# Altium PCB Screen.PcbDoc
Units mil, origin at the board's own origin, x right, y up, seen from the top; angles counter-clockwise.
Board outline 1732.28 x 1732.28 mil, 2 copper layers (Top Layer, Bottom Layer); 17 components, 9 nets, 39 pads, 68 vias.
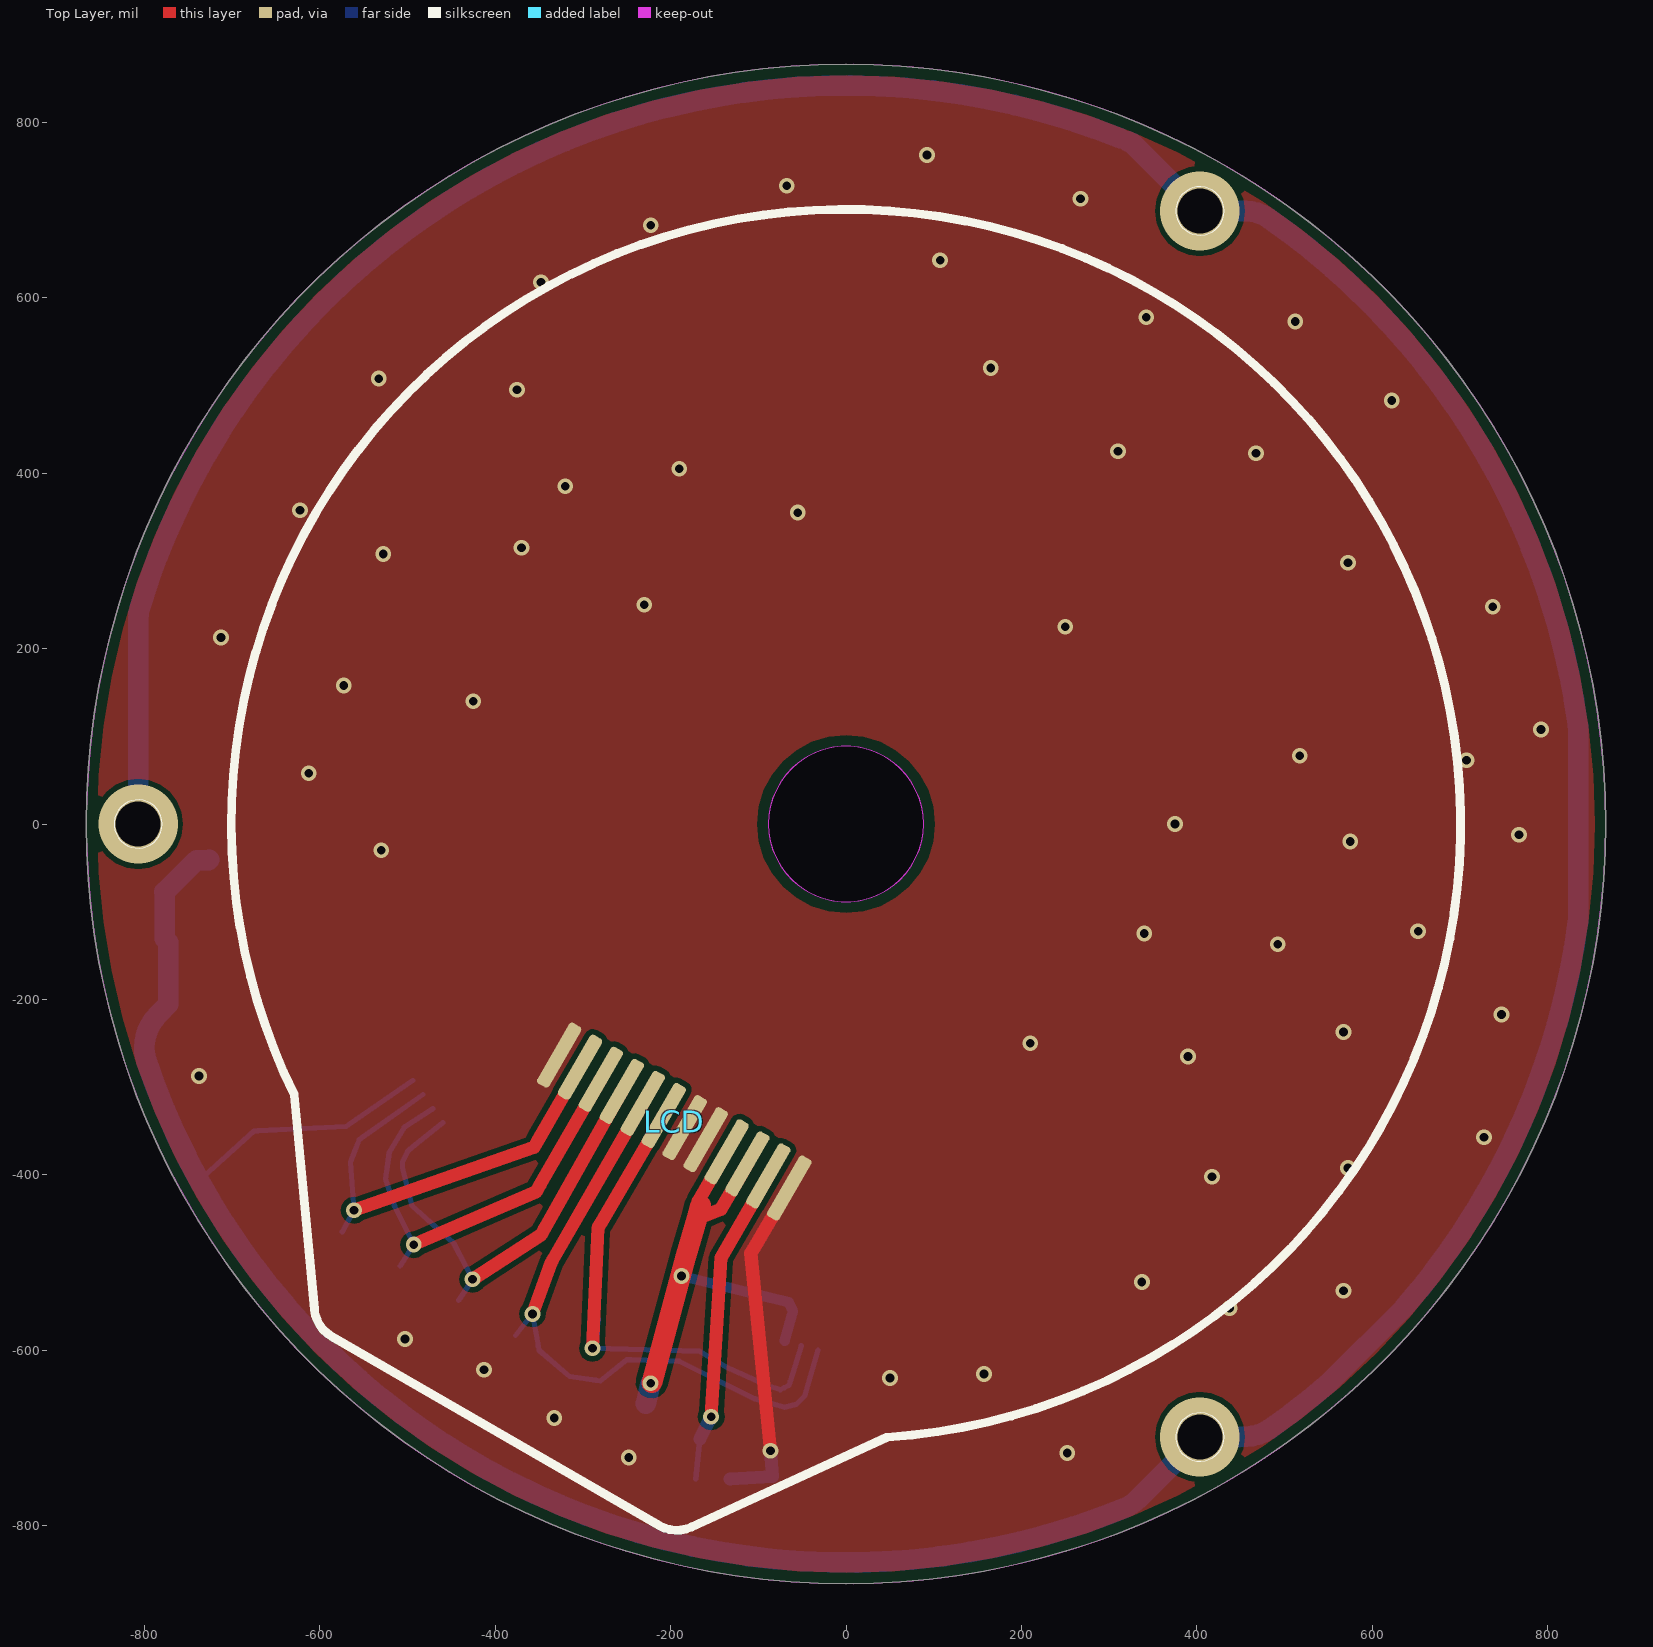
[diagram p0: Top Layer view]
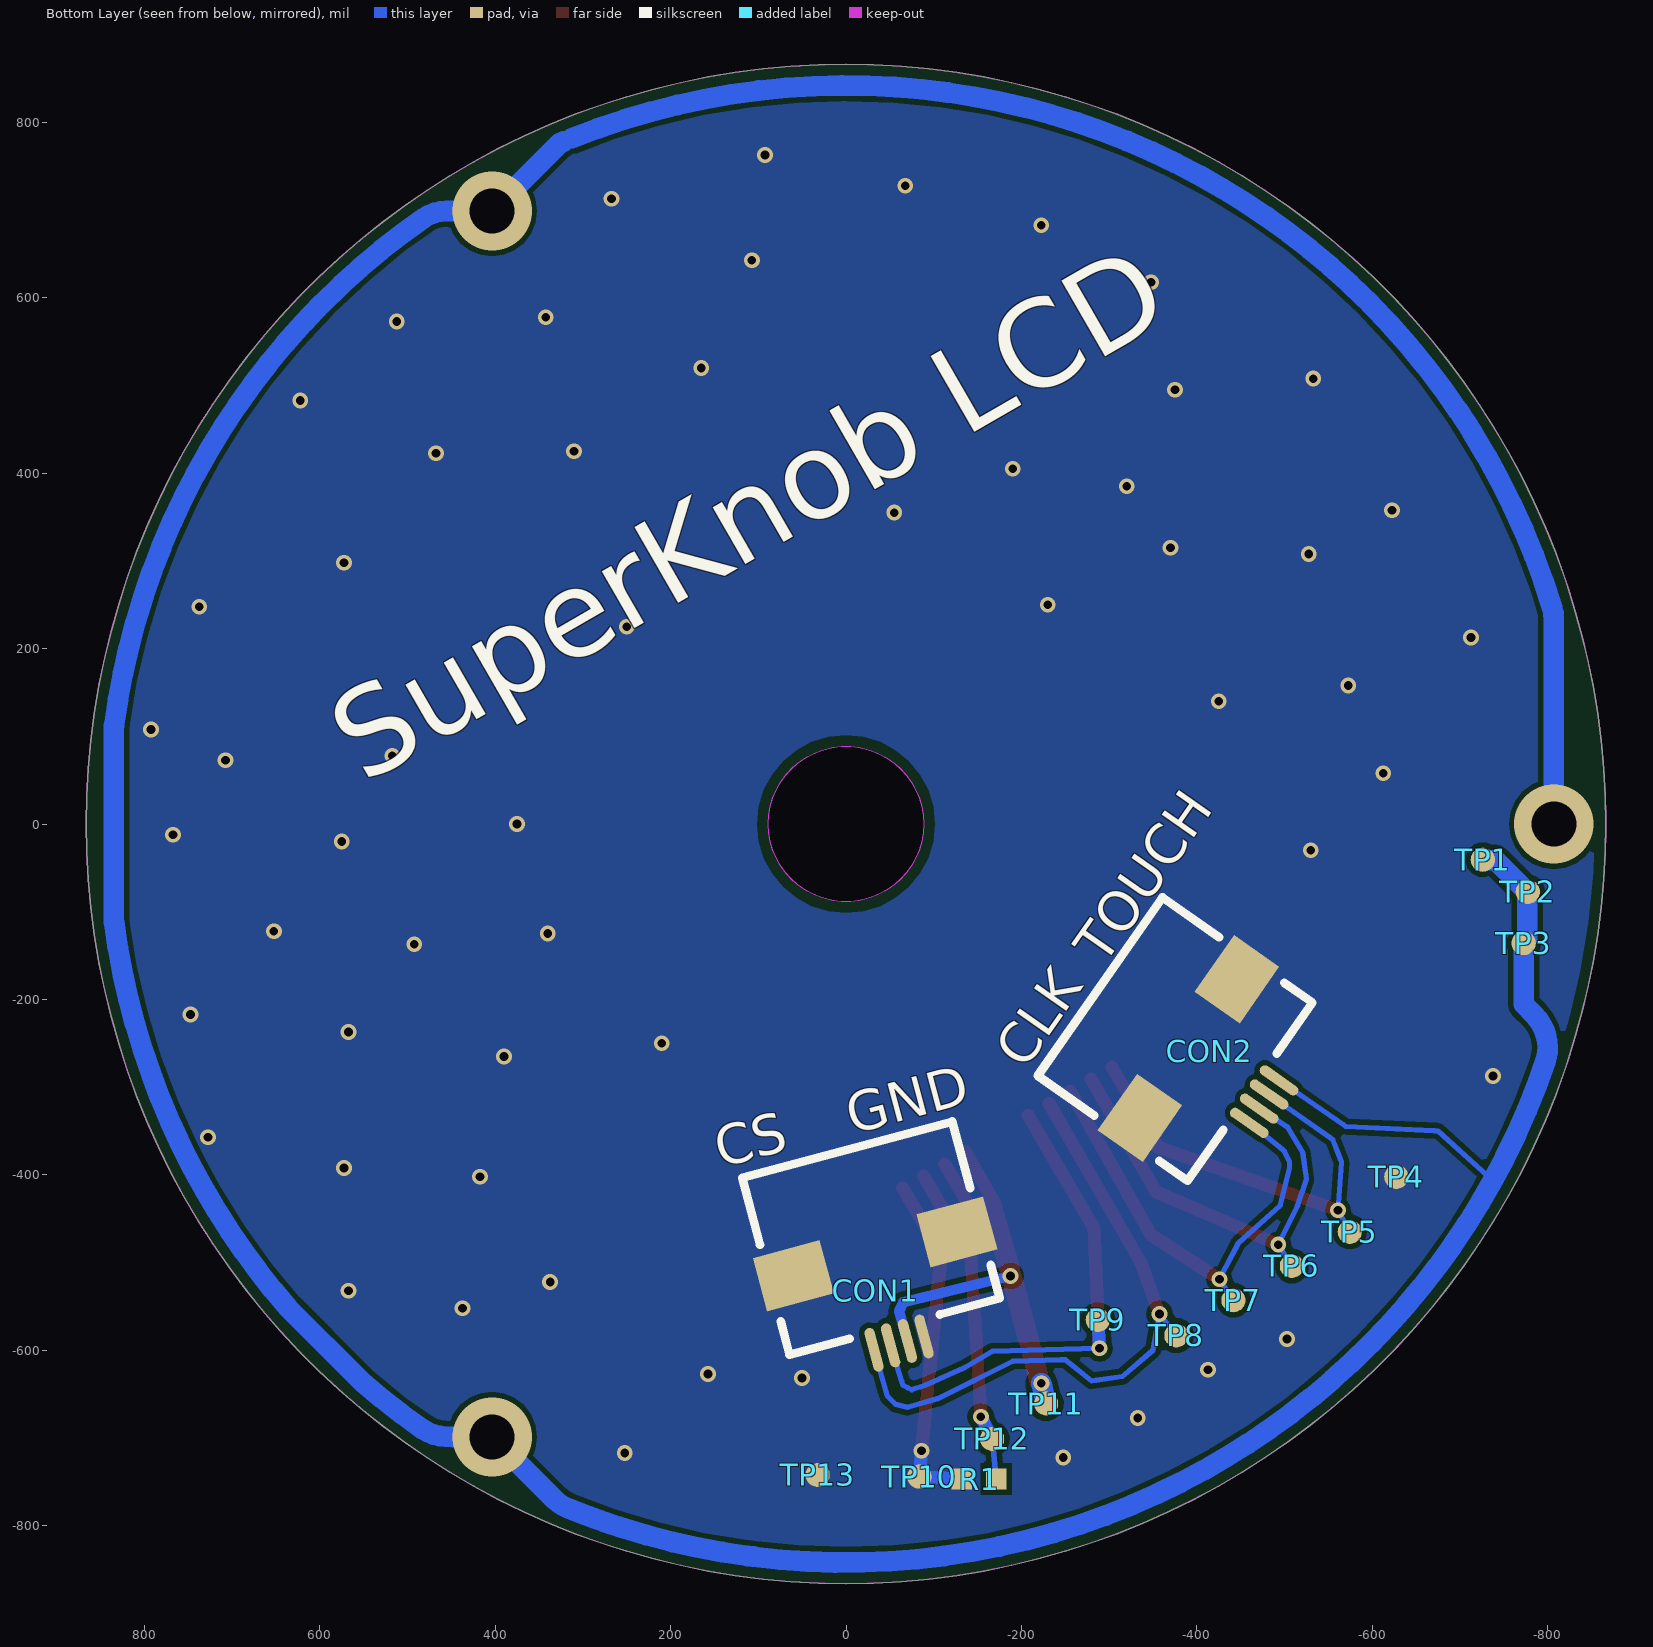
[diagram p1: Bottom Layer view, seen from below]
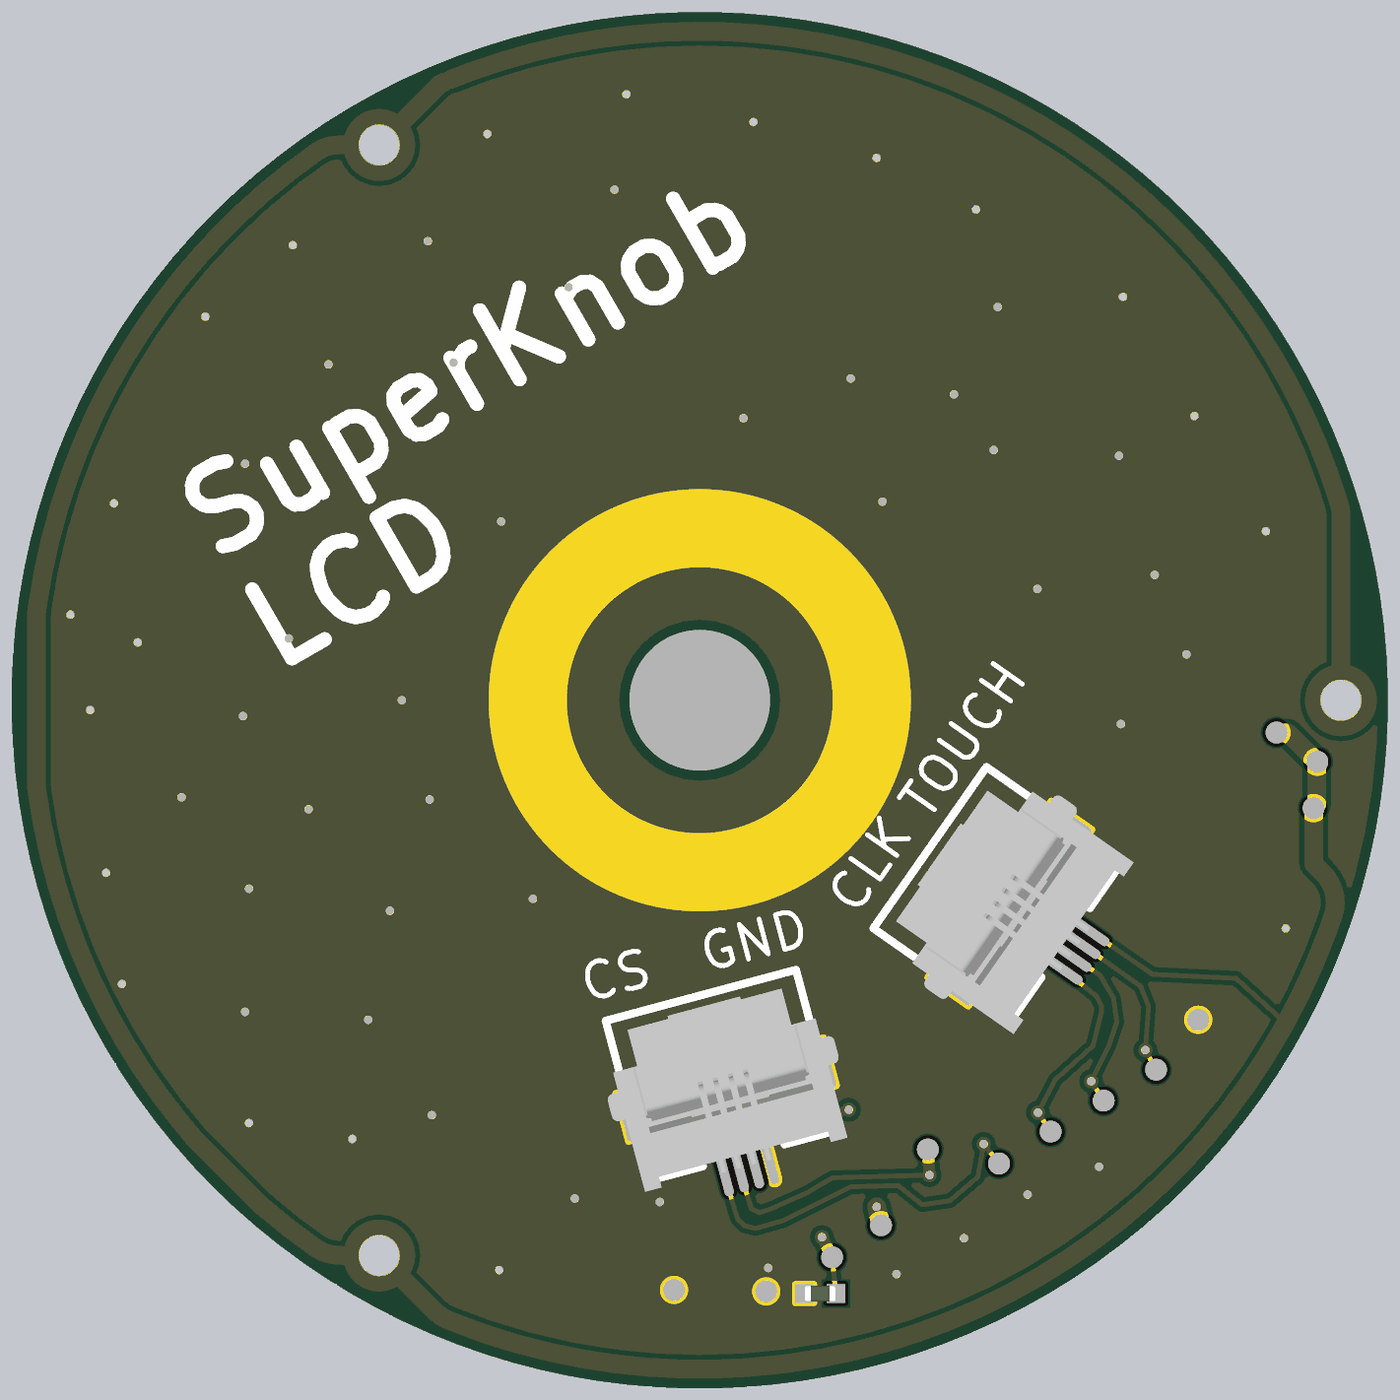
[diagram p2: 3D render of the assembled board from below, using the file's embedded part models]

## Layer stack, top to bottom
Top Solder: solder mask 0.4, Solder Resist, Dk 3.5
Top Layer: signal copper 1.4
Dielectric 1: dielectric 12.6, FR-4, Dk 4.8
Bottom Layer: signal copper 1.4
Bottom Solder: solder mask 0.4, Solder Resist, Dk 3.5

## Board outline
-866.14,0 ccw(c0,0) 0,-866.14 ccw(c0,0) 866.14,0 ccw(c0,0) 0,866.14 ccw(c0,0)
cut-out: -88.58,0 ccw(c0,0) 0,-88.58 ccw(c0,0) 88.58,0 ccw(c0,0) 0,88.58 ccw(c0,0)

## Design rules (kind name [scope] priority, off if disabled: settings)
Clearance Clearance_outline [OnLayer('Keep-Out Layer')] p1: gap=12 ignorepadtopadclearanceinfootprint=FALSE
Clearance [All] p2: gap=6 ignorepadtopadclearanceinfootprint=FALSE except(7: SMDPad-SMDPad; 8: Arc-Via Arc-Hole Track-Via Track-Hole SMDPad-Via SMDPad-Hole THPad-Via THPad-Hole Via-Via Via-Hole Fill-Hole Poly-Hole Region-Hole Text-Hole)
DiffPairsRouting [All] p1: maxlimit=10 minlimit=8 mostfreqgap=8 toplayer_minwidth=8 toplayer_maxwidth=8 toplayer_prefwidth=8 bottomlayer_minwidth=8 bottomlayer_maxwidth=8 bottomlayer_prefwidth=8 maxuncoupledlength=500
HoleToHoleClearance [All] p1: gap=0 allowstackedmicrovias=TRUE
MinimumSolderMaskSliver [All] p1: minsoldermaskwidth=0
PlaneConnect [All] p1: planeconnectstyle=Relief reliefexpansion=20 reliefentries=4 reliefconductorwidth=10 reliefairgap=20
PolygonConnect [All] p1: connectstyle=Direct reliefconductorwidth=10 reliefentries=4 polygonreliefangle="90 Angle" airgapwidth=20
RoutingVias [All] p1: holewidth=10 width=18 viastyle="Through Hole" minholewidth=10 minwidth=18 maxholewidth=78.74 maxwidth=300
SilkToSilkClearance [All] p1: silktosilkclearance=0
SilkToSolderMaskClearance [IsPad] p1: minsilkscreentomaskgap=0 clearancetoexposedcopper=TRUE
SolderMaskExpansion [All] p1: expansion=4 istentingtop=FALSE
Width [All] p1: maxlimit=100 minlimit=6 preferedwidth=6
24 further rules are at their usual default settings.

## Components (designator, comment, footprint, x,y, rotation, side; value= is the part's Value field where it differs from the comment)
CON1 "FPC_0.5mm_4P" FPC_0.5_4P -46.82,-540.99 r345 bottom locked
CON2 "FPC_0.5mm_4P" FPC_0.5_4P -433.54,-286.25 r305 bottom locked
LCD "LCD1" LCD-240x240-ROUND 0,0 r330 top locked
R1 "100R" RESC_0402 -151.64,-746.85 r180 bottom value=22R
TP1 "TP" TP -726.04,-40.68 r150 bottom
TP2 "TP" TP -777.38,-77.35 r150 bottom
TP3 "TP" TP -772.68,-135.8 r150 bottom
TP4 "TP" TP -627.46,-402.21 r150 bottom
TP5 "TP" TP -574.37,-465.04 r150 bottom
TP6 "TP" TP -508.38,-503.95 r150 bottom
TP7 "TP" TP -441.72,-542.98 r150 bottom
TP8 "TP" TP -376.69,-583.19 r150 bottom
TP9 "TP" TP -287.12,-565.44 r150 bottom
TP10 "TP" TP -83.65,-744.08 r150 bottom
TP11 "TP" TP -228.16,-660.79 r150 bottom
TP12 "TP" TP -166.64,-701.19 r150 bottom
TP13 "TP" TP 32.33,-742.22 r90 bottom

## Footprints (in the part's own frame and the unit in brackets; to place one, negate y for a bottom-side part, rotate by r counter-clockwise, add the part's x,y. Pads: shape width x height; smd on the part's side, far side on the other; paste and mask are expansions set on the pad)
FPC_0.5_4P [mm]
  rect 2x1.6 smd: 0(-2.45,-1.34) 0(2.45,-1.34)
  oval 0.3x1.3 smd: 1(-0.75,1.34) 2(-0.25,1.34) 3(0.25,1.34) 4(0.75,1.34)
  silkscreen extent -3.15,-4.46 3.15,0.84, body extent -3.75,-4.1 3.75,1.2, height 1.88
LCD-240x240-ROUND [mil]
  rrect50% 15.75x80 smd: 1(151.57,-391.76) 2(124.01,-391.76) 3(96.45,-391.76) 4(68.89,-391.76) 5(41.33,-391.76) 6(13.77,-391.76) 7(-13.79,-391.76) 8(-41.35,-391.76) 9(-68.91,-391.76) 10(-96.47,-391.76) 11(-124.03,-391.76) 12(-151.58,-391.76)
  silkscreen extent -701,-799 701,701, body extent -701,-799 701,701
RESC_0402 [mm]
  rect 0.6x0.6 smd: 1(-0.5,0) 2(0.5,0)
  body extent -0.5,-0.25 0.5,0.25, height 0.38
TP [mm]
  round 0.7 smd: 1(0,0)

## Part data
CON1 CON2: "FPC连接器"
LCD: library part LCD, "屏幕排线接口"
R1: library part 电阻-0402, "贴片电阻"
TP1 TP2 TP3 TP4 TP5 TP6 TP7 TP8 TP9 TP10 TP11 TP12 TP13: "测试点"

## Via types
v1: diameter 18, hole 10, Top Layer to Bottom Layer, tented both sides, 65 vias
v2: diameter 90.55, hole 51.18, Top Layer to Bottom Layer, 3 vias

## Nets (pads, with @x,y where several pads share a name; then routed paths per layer and width w, separated by ;. In a path a pad name is that pad's centre, name@x,y a point inside that pad or via, vN(x,y) a via of type N, cw(c..) or ccw(c..) an arc to the next point about the centre after c; other vN are vias at no path point)
3V3: CON1.2 LCD.3 LCD.4 TP11.1 | length 564.6
  Top Layer w15: -170.05,-449.98 -161.12,-446.52 -142.64,-439.36 LCD.3 ; -168.95,-434.38 -168.46,-430.21 LCD.4
  Top Layer w23.62: v1@-221.46,-636.75 -182.24,-492.34 -170.05,-449.98 -165.68,-434.76
  Bottom Layer w12: v1(-187.65,-515.45) -65.3,-545.17 -60.6,-555.34 CON1.2
  Bottom Layer w23.62: TP11.1 v1(-222.74,-637.59)
CS: CON1.4 LCD.8 TP8.1 | length 738.3
  Top Layer w15: v1(-357.43,-558.54) -335.93,-499.66 -334.64,-497.41 LCD.8
  Bottom Layer w6: TP8.1 v1(-357.43,-558.54) -350.75,-595.79 -350,-600 -317.65,-627.73 -315,-630 -285.14,-634.27 -280,-635 -249.88,-610.9 -245.5,-610.9 -190.1,-612.45 -105,-655 -103.93,-655.31 -73.09,-664.12 -70,-665 -56.39,-661.6 -47.54,-652.62 -45.08,-645.24 -45,-645 CON1.4
DC: CON1.3 LCD.7 TP9.1 | length 601.2
  Top Layer w15: v1(-289.11,-597.68) -282.87,-460.81 -279.14,-454.42 LCD.7
  Bottom Layer w6: v1(-289.11,-597.68) -166.95,-601.09 -164.27,-602.68 -135,-620 -134.36,-620.28 -90,-640 -89.45,-640.18 -75,-645 -70.55,-642.78 -65,-640 -63.49,-635.1 CON1.3
  Bottom Layer w15: v1(-289.11,-597.68) TP9.1
GND: CON1.0 CON1.1 CON2.0 LCD.1 LCD.5 LCD.6 LCD.12 R1.1 TP4.1 TP10.1 TP13.1 | length 390.6
  Top Layer w15: v1(-86.09,-714.63) -108.57,-489.48 -103.58,-481.02 LCD.1
  Bottom Layer w15: R1.1 TP10.1 v1(-86.09,-714.63)
  other v1: -247.67,-722.22 252.33,-717.22 -332.67,-677.22 50.32,-631.57 157.33,-627.22 -412.67,-622.22 -502.67,-587.22 437.33,-552.22 567.33,-532.22 337.33,-522.22 417.33,-402.22 572.33,-392.22 727.33,-357.22 -737.67,-287.22 390,-265 210,-250 567.33,-237.22 747.33,-217.22 492.33,-137.22 340,-125 652.33,-122.22 -530,-30 575,-20 767.33,-12.22 375,0 -612.67,57.78 707.33,72.78 517.33,77.78 792.33,107.78 -425,140 -572.67,157.78 -712.67,212.78 250,225 737.33,247.78 -230,250 572.33,297.78 -527.67,307.78 -370,315 -55,355 -622.67,357.78 -320,385 -190,405 467.33,422.78 310,425 622.33,482.78 -375,495 -532.67,507.78 165,520 512.33,572.78 342.33,577.78 -347.67,617.78 107.33,642.78 -222.67,682.78 267.33,712.78 -67.67,727.78 92.33,762.78
LCD_BLK: LCD.2 R1.2 TP12.1 | length 363.8
  Top Layer w15: v1(-153.77,-675.9) -142.47,-494.44 LCD.2
  Bottom Layer w6: R1.2 -169.65,-730.51 TP12.1
  Bottom Layer w15: TP12.1 v1(-153.77,-675.9)
MOSI: CON2.3 LCD.10 TP6.1 | length 513.4
  Top Layer w15: v1(-492.77,-479.6) -353.39,-419.35 -348.43,-410.74 LCD.10
  Bottom Layer w6: TP6.1 v1(-492.77,-479.6) -514.62,-435.76 -515,-435 -525,-405 -520.78,-374.54 -503.68,-345.86 CON2.3
RST: CON2.2 LCD.11 TP5.1 | length 522.3
  Top Layer w15: v1(-560.92,-440.34) -355.73,-368.77 -350.16,-359.05 LCD.11
  Bottom Layer w6: TP5.1 v1(-560.92,-440.34) -564.94,-385.81 -564.97,-385.36 -561.47,-376.44 -555,-360 -552.09,-357.93 -506.83,-325.79 CON2.2
SCLK: CON2.4 LCD.9 TP7.1 | length 536.2
  Top Layer w15: v1(-425.72,-519.12) -347.63,-468.32 -344.02,-461.91 LCD.9
  Bottom Layer w6: CON2.4 -490.99,-365.8 -497.89,-371.35 -499.72,-373.19 -505.65,-385.04 -505.65,-392.22 -495.89,-431.43 -495,-435 -447.56,-477.62 v1(-425.72,-519.12) TP7.1
TOUCH1: CON2.1 TP1.1 TP2.1 TP3.1 | length 5768.3
  Bottom Layer w6: -737.53,-406.39 -675,-350 -670.72,-349.8 -570,-345 -567.18,-343.05 CON2.1
  Bottom Layer w23.62: v2(-807.09,0) -807.09,233.25 cw(c-759.84,233.25) -805,247.13 cw(c0,0) -528.43,655.64 cw(c0,0) 4.81,842.07 4.89,842.07 cw(c0,0) 312.81,781.83 ; TP1.1 -726.79,-41.43 -740.41,-41.43 -776.32,-77.35 TP2.1 -776.63,-78.1 -776.63,-130.78 -772.68,-134.73 TP3.1 -772.68,-205.53 -784.2,-217.05 ccw(c-746.06,-255.19) -800,-255.19 ccw(c-752.76,-255.19) -797.53,-270.26 ccw(c0,0) -737.53,-406.39 ccw(c0,0) -637.63,-550.02 ccw(c0,0) -354.46,-763.84 ccw(c0,0) -112.17,-834.58 ccw(c-105.86,-787.76) -112.05,-834.59 ccw(c0,0) 227.7,-810.71 ; 105.86,-835 ccw(c105.86,-787.76) 112.05,-834.59 ccw(c0,0) 227.58,-810.74 ccw(c214.83,-765.25) 227.7,-810.71 ; 254.11,-802.82 ccw(c0,0) 317.16,-780.07 ; 321.81,778.16 cw(c303.68,734.54) 326.56,775.87 326.72,775.78 v2(403.54,698.96) 454.62,698.96 cw(c454.62,598.96) 455.25,698.96 cw(c455.01,651.71) 482.13,690.4 cw(c0,0) 597.93,592.94 cw(c0,0) 834.59,112.05 cw(c787.76,105.86) 835,105.76 835,-105.76 cw(c787.76,-105.86) 834.57,-112.25 cw(c0,0) 744.22,-394 cw(c0,0) 635.86,-552.07 553.3,-634.63 cw(c519.85,-601.26) 550.74,-637.02 cw(c0,0) 482.99,-689.8 cw(c455.98,-651.04) 463.26,-697.72 cw(c447.55,-598.96) 447.55,-698.96 v2(403.54,-698.96) 332.84,-769.66 cw(c299.39,-736.29) 317.17,-780.07 ; 227.7,-810.71 ccw(c0,0) 317.16,-780.07

## Polygon pours and split planes (outlines as drawn)
GND on Bottom Layer "NONET_L-01_P-001" (solid, remove dead copper, pour order 1): -866.14,0 ccw(c0,0) 0,-866.14 ccw(c0,0) 866.14,0 ccw(c0,0) 0,866.14 ccw(c0,0)
GND on Top Layer "NONET_L-01_P-001" (solid, remove dead copper, pour order 0): -866.14,0 ccw(c0,0) 0,-866.14 ccw(c0,0) 866.14,0 ccw(c0,0) 0,866.14 ccw(c0,0)

## Keep-outs
Keep-Out Layer:
  circle w0.5: c0,0 r866.14
  circle w0.5: c0,0 r88.58

## Silkscreen, mask and mechanical layers (free items; w line width, h text height)
Top Overlay:
  circle w0.39: c-807.09,0 r27.56
  circle w0.39: c403.54,698.96 r27.56
  circle w0.39: c403.54,-698.96 r27.56
Bottom Overlay:
  text "SuperKnob LCD" at 550,45 h100 r330
  text "TOUCH" at -294.14,-162.49 h45 r305
  text "CLK" at -203.61,-281.45 h45 r305
  text "GND" at -7.22,-353.88 h45 r345
  text "CS" at 143.05,-392.13 h45 r345
Top Solder:
  circle w98.43: c0,0 r216.54
Bottom Solder:
  circle w98.43: c0,0 r216.54
Mechanical 8:
  lines w0.5: -964.57,0 -196.85,0 ; -933.07,0 -905.51,0 -807.09,0 ; -807.09,-125.98 -807.09,-98.43 -807.09,0 ; -807.09,125.98 -807.09,98.43 -807.09,0 ; -681.1,0 -708.66,0 -807.09,0 ; -98.43,0 0,0 ; 0,-964.57 0,-196.85 ; 0,-98.43 0,0 ; 0,98.43 0,0 ; 0,196.85 0,964.57 ; 98.43,0 0,0 ; 196.85,0 964.57,0 ; 277.56,-698.96 305.12,-698.96 403.54,-698.96 ; 277.56,698.96 305.12,698.96 403.54,698.96 ; 403.54,-824.94 403.54,-797.38 403.54,-698.96 ; 403.54,-572.97 403.54,-600.53 403.54,-698.96 ; 403.54,572.97 403.54,600.53 403.54,698.96 ; 403.54,824.94 403.54,797.38 403.54,698.96 ; 529.53,-698.96 501.97,-698.96 403.54,-698.96 ; 529.53,698.96 501.97,698.96 403.54,698.96